# EAGLE board slickv2 (EAGLE 7.6.0)
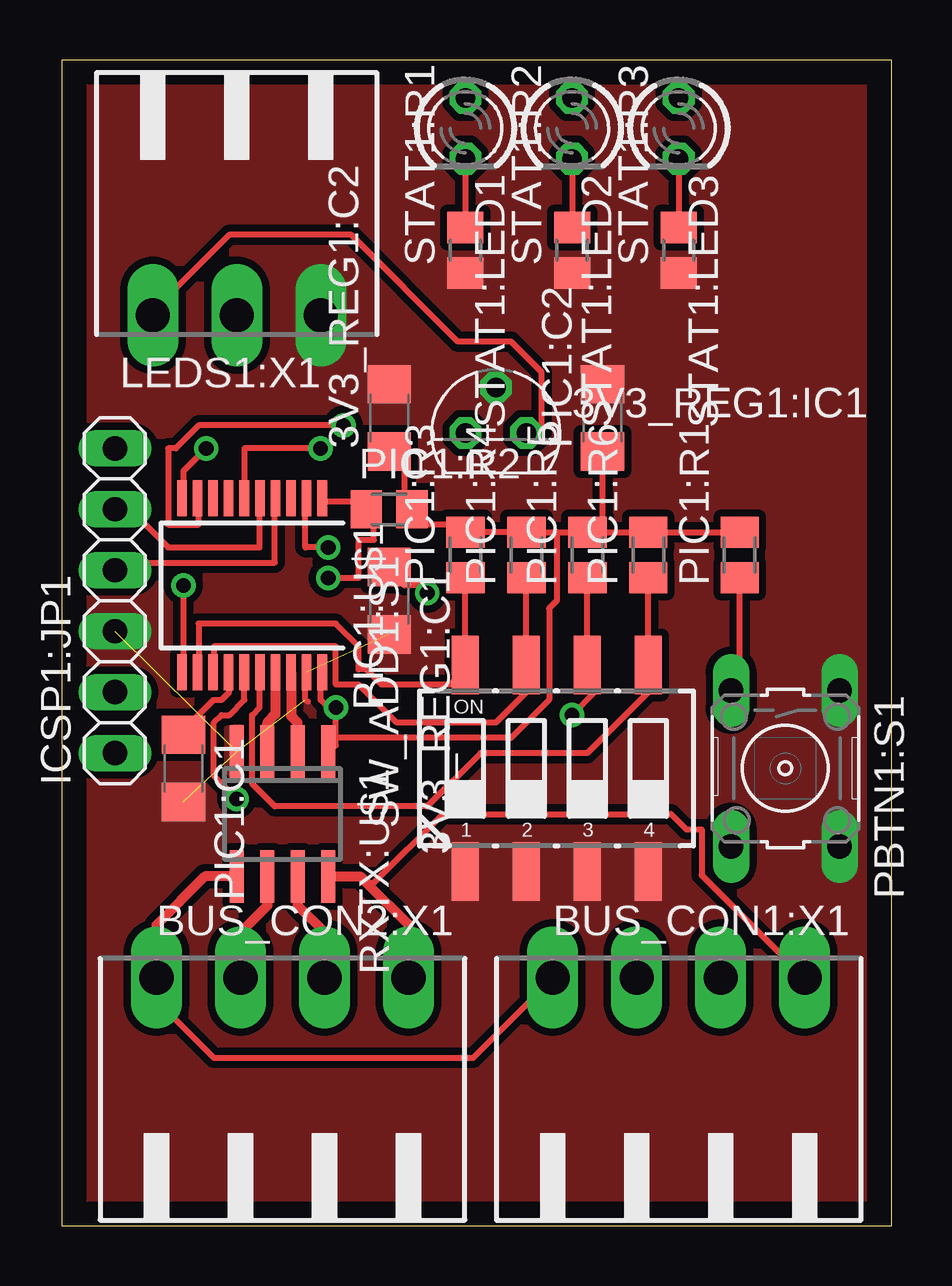
[diagram p0: board, top side]
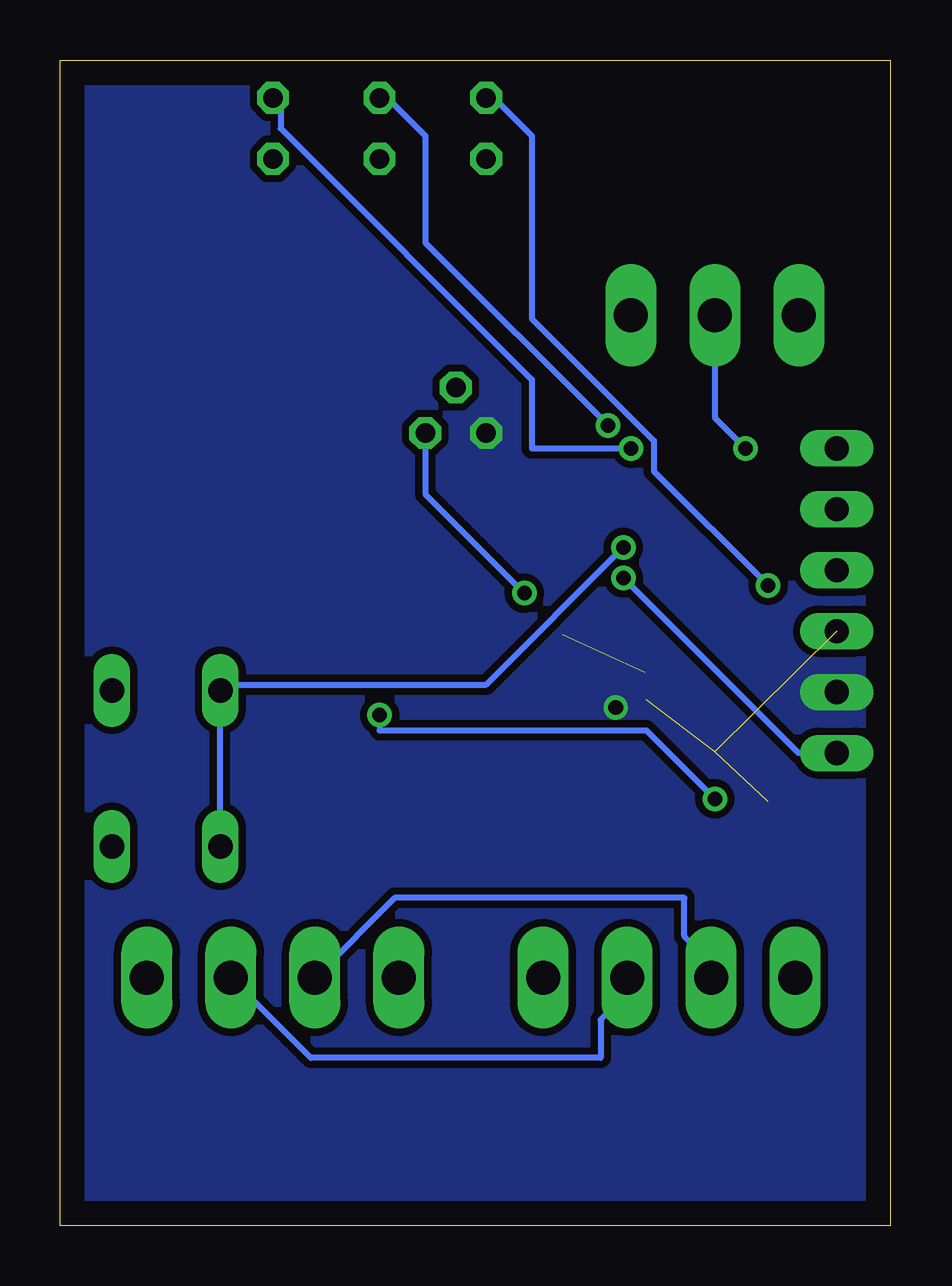
[diagram p1: board, bottom side, seen from below]

Size 34.59 x 48.56 mm. Coordinates in mm from the lower left corner, seen from the top.
Outline: 0,0 34.59,0 34.59,48.56 0,48.56 0,0
Copper layers (1*16): Top 0.035mm / dielectric 1.5mm / Bottom 0.035mm
Design rules "default": minimum track width 10mil, minimum drill 24mil, track to track 8mil, track to pad 8mil, pad to pad 8mil, via to via 8mil, smd to smd 8mil, copper to edge 40mil, drill to drill 8mil, minimum pad ring 10mil, minimum via ring 8mil, stop-mask expansion 4mil, vias tented up to drill 0mil, thermal gap 10mil
Net classes: 0 default: clearance 0.205 mm

## Footprints (pad centres in the part's own frame; a part is rotated, then mirrored left to right if it is on the bottom)
C1206 = smd 1.6 x 1.8: 1 -1.4,0; 2 1.4,0
TO92 = drill 0.813 octagon: 1 -1.27,0; 2 0,1.905; 3 1.27,0
90G-4 = drill 1.422 long: 1 -5.25,5.25; 2 -1.75,5.25; 3 1.75,5.25; 4 5.25,5.25
1X06 = drill 1.016 long: 1 -6.35,0; 2 -3.81,0; 3 -1.27,0; 4 1.27,0; 5 3.81,0; 6 6.35,0
90G-3 = drill 1.422 long: 1 -3.5,5.25; 2 0,5.25; 3 3.5,5.25
B3F-10XX = drill 1.016 long: 1 -3.251,2.261; 2 3.251,2.261; 3 -3.251,-2.261; 4 3.251,-2.261
M0805 = smd 1.3 x 1.6: 1 -0.95,0; 2 0.95,0
SSOP20 = smd 0.4 x 1.5: 1 -2.925,-3.625; 2 -2.275,-3.625; 3 -1.625,-3.625; 4 -0.975,-3.625; 5 -0.325,-3.625; 6 0.325,-3.625; 7 0.975,-3.625; 8 1.625,-3.625; 9 2.275,-3.625; 10 2.925,-3.625; 11 2.925,3.625; 12 2.275,3.625; 13 1.625,3.625; 14 0.975,3.625; 15 0.325,3.625; 16 -0.325,3.625; 17 -0.975,3.625; 18 -1.625,3.625; 19 -2.275,3.625; 20 -2.925,3.625
SO-08 = smd 0.6 x 2.2: 1 -1.905,-2.6; 2 -0.635,-2.6; 3 0.635,-2.6; 4 1.905,-2.6; 5 1.905,2.6; 6 0.635,2.6; 7 -0.635,2.6; 8 -1.905,2.6
LED3MM = drill 0.813 octagon: A -1.27,0; K 1.27,0
R0805 = smd 1.3 x 1.5: 1 -0.95,0; 2 0.95,0
CTS-219-04 = smd 1.13 x 2.44: 1 -3.81,-4.3; 2 -1.27,-4.3; 3 1.27,-4.3; 4 3.81,-4.3; 5 3.81,4.3; 6 1.27,4.3; 7 -1.27,4.3; 8 -3.81,4.3

## Placement (x,y rotation side)
3V3_REG1:C1  100n  [C1206]  13.65,26.04 270 top
3V3_REG1:C2  100n  [C1206]  13.65,33.65 90 top
3V3_REG1:IC1  LP2950ACZ-3.3  [TO92]  18.1,33.02 0 top
BUS_CON1:X1  [90G-4]  25.72,5.08 0 top
BUS_CON2:X1  [90G-4]  9.21,5.08 0 top
ICSP1:JP1  [1X06]  2.22,26.04 90 top
LEDS1:X1  [90G-3]  7.3,43.18 180 top
PBTN1:S1  [B3F-10XX]  30.16,19.05 270 top
PIC1:C1  10u  [C1206]  5.08,19.05 270 top
PIC1:C2  100n  [C1206]  22.54,33.65 90 top
PIC1:R1  10k  [M0805]  28.26,27.94 90 top
PIC1:R2  10k  [M0805]  13.65,29.84 0 top
PIC1:R3  10k  [M0805]  16.83,27.94 90 top
PIC1:R4  10k  [M0805]  19.37,27.94 90 top
PIC1:R5  10k  [M0805]  21.91,27.94 90 top
PIC1:R6  10k  [M0805]  24.45,27.94 90 top
PIC1:U$1  PIC32MM0016GPL020  [SSOP20]  7.94,26.67 180 top
RXTX:U$1  SN65HVD51  [SO-08]  9.21,17.14 180 top
STAT1:LED1  GRN  [LED3MM]  16.83,45.72 270 top
STAT1:LED2  BLU  [LED3MM]  21.27,45.72 270 top
STAT1:LED3  RED  [LED3MM]  25.72,45.72 270 top
STAT1:R1  [R0805]  16.83,40.64 90 top
STAT1:R2  [R0805]  21.27,40.64 90 top
STAT1:R3  [R0805]  25.72,40.64 90 top
SW_ADD1:S1  219-04  [CTS-219-04]  20.64,19.05 0 top

## Library data of the parts
3V3_REG1:C1 3V3_REG1:C2 PIC1:C1 PIC1:C2 PIC1:R1-PIC1:R6 STAT1:R1-STAT1:R3 = rcl
3V3_REG1:IC1 = v-reg
BUS_CON1:X1 BUS_CON2:X1 LEDS1:X1 = con-weidmueller-sl35; OC_FARNELL: unknown; OC_NEWARK: unknown
ICSP1:JP1 = pinhead
PBTN1:S1 = switch-omron; MPN: B3F-1000; OC_FARNELL: 176432; OC_NEWARK: 36M3542
PIC1:U$1 = PIC32MM0016GPL020
RXTX:U$1 = SN65HVD51
STAT1:LED1-STAT1:LED3 = led
SW_ADD1:S1 = switch-dil; OC_FARNELL: unknown; OC_NEWARK: unknown

## Nets
+3V3: 3V3_REG1:C2.1 3V3_REG1:IC1.1 ICSP1:JP1.2 PIC1:C2.1 PIC1:R1.2 PIC1:R2.2 PIC1:R3.2 PIC1:R4.2 PIC1:R5.2 PIC1:R6.2 PIC1:U$1.20 RXTX:U$1.1
+5V: 3V3_REG1:C1.1 3V3_REG1:IC1.3 LEDS1:X1.3
COM0: BUS_CON1:X1.4 BUS_CON2:X1.4 RXTX:U$1.8
COM1: BUS_CON1:X1.3 BUS_CON2:X1.3 RXTX:U$1.7
COM2: BUS_CON1:X1.2 BUS_CON2:X1.2 RXTX:U$1.6
COM3: BUS_CON1:X1.1 BUS_CON2:X1.1 RXTX:U$1.5
GND: 3V3_REG1:C1.2 3V3_REG1:C2.2 3V3_REG1:IC1.2 ICSP1:JP1.3 LEDS1:X1.1 PBTN1:S1.1 PBTN1:S1.2 PIC1:C1.2 PIC1:C2.2 PIC1:U$1.19 RXTX:U$1.4 STAT1:R1.1 STAT1:R2.1 STAT1:R3.1 SW_ADD1:S1.1 SW_ADD1:S1.2 SW_ADD1:S1.3 SW_ADD1:S1.4
ICSP1:AUX: ICSP1:JP1.6
LEDS: LEDS1:X1.2 PIC1:U$1.10
N$1: PIC1:U$1.18 RXTX:U$1.2
N$2: PIC1:U$1.17 RXTX:U$1.3
N$3: PIC1:U$1.11 STAT1:LED1.A
N$4: PIC1:U$1.9 STAT1:LED2.A
N$5: PIC1:U$1.6 STAT1:LED3.A
N$6: ICSP1:JP1.1 PIC1:R2.1 PIC1:U$1.1
N$7: ICSP1:JP1.5 PIC1:U$1.5
N$8: ICSP1:JP1.4 PIC1:U$1.4
N$9: PIC1:R6.1 PIC1:U$1.16 SW_ADD1:S1.5
N$10: PIC1:R5.1 PIC1:U$1.15 SW_ADD1:S1.6
N$11: PIC1:R4.1 PIC1:U$1.13 SW_ADD1:S1.7
N$12: PIC1:R3.1 PIC1:U$1.12 SW_ADD1:S1.8
N$13: PBTN1:S1.3 PBTN1:S1.4 PIC1:R1.1 PIC1:U$1.2
PIC1:N$6: PIC1:C1.1 PIC1:U$1.14
PIC1:RA1: PIC1:U$1.3
PIC1:RA2: PIC1:U$1.7
PIC1:RA3: PIC1:U$1.8
STAT1:N$1: STAT1:LED1.K STAT1:R1.2
STAT1:N$2: STAT1:LED2.K STAT1:R2.2
STAT1:N$3: STAT1:LED3.K STAT1:R3.2

## Tracks (layer width: path | path; a pad name or v marks a point on that pad's centre or on a via)
+3V3  (via drill 0.61)
  Top 0.254: 11.11,21.59 11.43,21.27 11.43,20.32 | 11.11,21.59 10.79,21.91 10.79,22.86 PIC1:U$1.20 | 11.43,20.32 11.43,20 11.11,20 RXTX:U$1.1 | v11.43,21.59 11.11,21.59 | 3V3_REG1:C2.1 13.65,32.07 14.29,32.07 14.29,29.84 PIC1:R2.2 15.24,29.21 16.51,29.21 PIC1:R3.2 | PIC1:R4.2 PIC1:R3.2 | PIC1:R4.2 20.64,28.89 | 20.64,28.89 PIC1:R5.2 | PIC1:R4.2 | PIC1:R5.2 22.54,28.89 | 22.54,28.89 PIC1:R6.2 | PIC1:R5.2 22.54,28.89 | PIC1:R6.2 PIC1:R1.2 | PIC1:R6.2 | 22.54,28.89 PIC1:C2.1 | PIC1:R3.2 | 11.43,20.32 18.73,20.32 20.32,21.91 20.32,25.72 20.64,26.04 20.64,28.89
  pour Bottom (isolate 0.305, no thermals): -3.49,49.53 35.88,49.53 35.88,-1.27 -3.49,-1.27
+5V  (via drill 0.61)
  Top 0.254: v15.24,26.35 14.92,26.67 14.29,26.67 13.65,27.3 3V3_REG1:C1.1 | 3V3_REG1:IC1.3 20,33.02 20,35.56 18.73,36.83 16.51,36.83 12.07,41.27 6.99,41.27 3.81,38.1 LEDS1:X1.3
  Bottom 0.254: v15.24,26.35 19.37,30.48 3V3_REG1:IC1.3
COM0
  Top 0.254: 12.7,14.29 13.02,14.29 15.87,17.14 25.4,17.14 26.04,16.51 26.67,16.51 26.67,14.61 30.8,10.48 BUS_CON1:X1.4
  Top 0.406: RXTX:U$1.8 12.44,14.54 12.7,14.29 14.46,12.53 BUS_CON2:X1.4
COM1
  Top 0.406: BUS_CON2:X1.3 10.96,12.22 9.84,13.34 RXTX:U$1.7
  Bottom 0.254: BUS_CON1:X1.3 27.31,10.16 24.13,6.99 12.07,6.99 12.07,8.57 11.11,9.53 11.11,10.16 BUS_CON2:X1.3
COM2
  Top 0.406: BUS_CON2:X1.2 7.46,12.22 8.57,13.34 RXTX:U$1.6
  Bottom 0.254: BUS_CON1:X1.2 23.81,10.48 20.64,13.65 8.57,13.65 8.57,12.07 7.62,11.11 7.62,10.48 BUS_CON2:X1.2
COM3
  Top 0.254: BUS_CON1:X1.1 20.32,10.16 17.15,6.99 6.35,6.99 4.13,9.21 4.13,10.16 BUS_CON2:X1.1
  Top 0.406: BUS_CON2:X1.1 3.96,12.53 5.97,14.54 RXTX:U$1.5
GND  (4 unrouted)
  Top 0.254: PIC1:U$1.19 10.16,22.86 10.16,21.91 10.27,21.84
  pour Top (isolate 0.305, no thermals): -2.22,48.26 35.88,48.26 35.88,0 -2.22,0
LEDS  (via drill 0.61)
  Top 0.254: v6.03,32.38 5.08,31.43 5.08,30.48 PIC1:U$1.10
  Bottom 0.254: v6.03,32.38 7.3,33.65 LEDS1:X1.2
N$1
  Top 0.406: PIC1:U$1.18 9.56,21.23 9.84,20.96 RXTX:U$1.2
N$2
  Top 0.406: PIC1:U$1.17 8.91,21.3 8.57,20.96 RXTX:U$1.3
N$3  (via drill 0.61)
  Top 0.254: v5.08,26.67 5.08,23.18 PIC1:U$1.11
  Bottom 0.254: v5.08,26.67 9.84,31.43 9.84,32.7 14.92,37.78 14.92,45.4 16.51,46.99 STAT1:LED1.A
N$4  (via drill 0.61)
  Top 0.254: v11.75,33.34 5.71,33.34 4.76,32.38 4.45,32.38 4.45,29.21 5.71,29.21 5.71,30.16 PIC1:U$1.9
  Bottom 0.254: v11.75,33.34 19.37,40.96 19.37,45.4 20.95,46.99 STAT1:LED2.A
N$5  (via drill 0.61)
  Top 0.254: v10.79,32.38 7.62,32.38 7.62,30.48 PIC1:U$1.6
  Bottom 0.254: v10.79,32.38 14.92,32.38 14.92,35.24 25.4,45.72 25.4,46.67 STAT1:LED3.A
N$6  (via drill 0.61)
  Top 0.254: PIC1:U$1.1 10.79,30.16 12.38,30.16 PIC1:R2.1 13.02,29.84 13.02,28.57 12.38,28.57 12.38,26.99 v11.11,26.99
  Bottom 0.254: v11.11,26.99 3.81,19.68 ICSP1:JP1.1
N$7
  Top 0.254: ICSP1:JP1.5 2.86,29.84 4.45,28.26 8.26,28.26 8.26,30.16 PIC1:U$1.5
N$8
  Top 0.254: ICSP1:JP1.4 2.54,27.62 8.89,27.62 8.89,30.16 PIC1:U$1.4
N$9
  Top 0.254: PIC1:U$1.16 8.26,22.86 8.26,21.59 7.94,21.27 7.94,18.41 8.89,17.46 15.24,17.46 17.46,19.68 21.91,19.68 24.45,22.23 SW_ADD1:S1.5 PIC1:R6.1
N$10  (via drill 0.61)
  Top 0.254: v7.3,17.78 6.35,18.73 6.35,20.96 6.67,21.27 6.99,21.27 7.62,21.91 7.62,22.86 PIC1:U$1.15 | v21.27,21.27 22.22,22.23 22.22,23.18 21.91,23.18 SW_ADD1:S1.6 PIC1:R5.1
  Bottom 0.254: v7.3,17.78 10.16,20.64 21.27,20.64 v21.27,21.27
N$11
  Top 0.254: PIC1:U$1.13 6.35,23.18 6.35,24.13 11.43,24.13 11.43,22.54 12.38,22.54 13.97,20.96 18.1,20.96 19.37,22.23 SW_ADD1:S1.7 PIC1:R4.1
N$12
  Top 0.254: PIC1:U$1.12 5.71,23.18 5.71,25.08 11.43,25.08 12.38,24.13 12.38,23.18 12.7,23.18 13.34,22.54 16.19,22.54 16.83,23.18 SW_ADD1:S1.8 PIC1:R3.1
N$13  (via drill 0.61)
  Top 0.254: v11.11,28.26 10.16,28.26 10.16,30.16 PIC1:U$1.2 | PIC1:R1.1 28.26,22.54 27.94,22.54 PBTN1:S1.3
  Bottom 0.254: v11.11,28.26 16.83,22.54 27.62,22.54 PBTN1:S1.3 27.94,22.23 27.94,15.88 PBTN1:S1.4
PIC1:N$6
  Top 0.254: PIC1:U$1.14 6.99,22.86 6.99,22.23 6.67,21.91 6.35,21.91 5.08,20.64 PIC1:C1.1
STAT1:N$1
  Top 0.254: STAT1:LED1.K STAT1:R1.2
STAT1:N$2
  Top 0.254: STAT1:LED2.K STAT1:R2.2
STAT1:N$3
  Top 0.254: STAT1:LED3.K STAT1:R3.2